# Altium PCB soldeerstation.PcbDoc
Units mil, origin at the board's own origin, x right, y up, seen from the top; angles counter-clockwise.
Board outline 3925 x 5005 mil, 2 copper layers (Top Layer, Bottom Layer); 68 components, 38 nets, 229 pads, 26 vias.
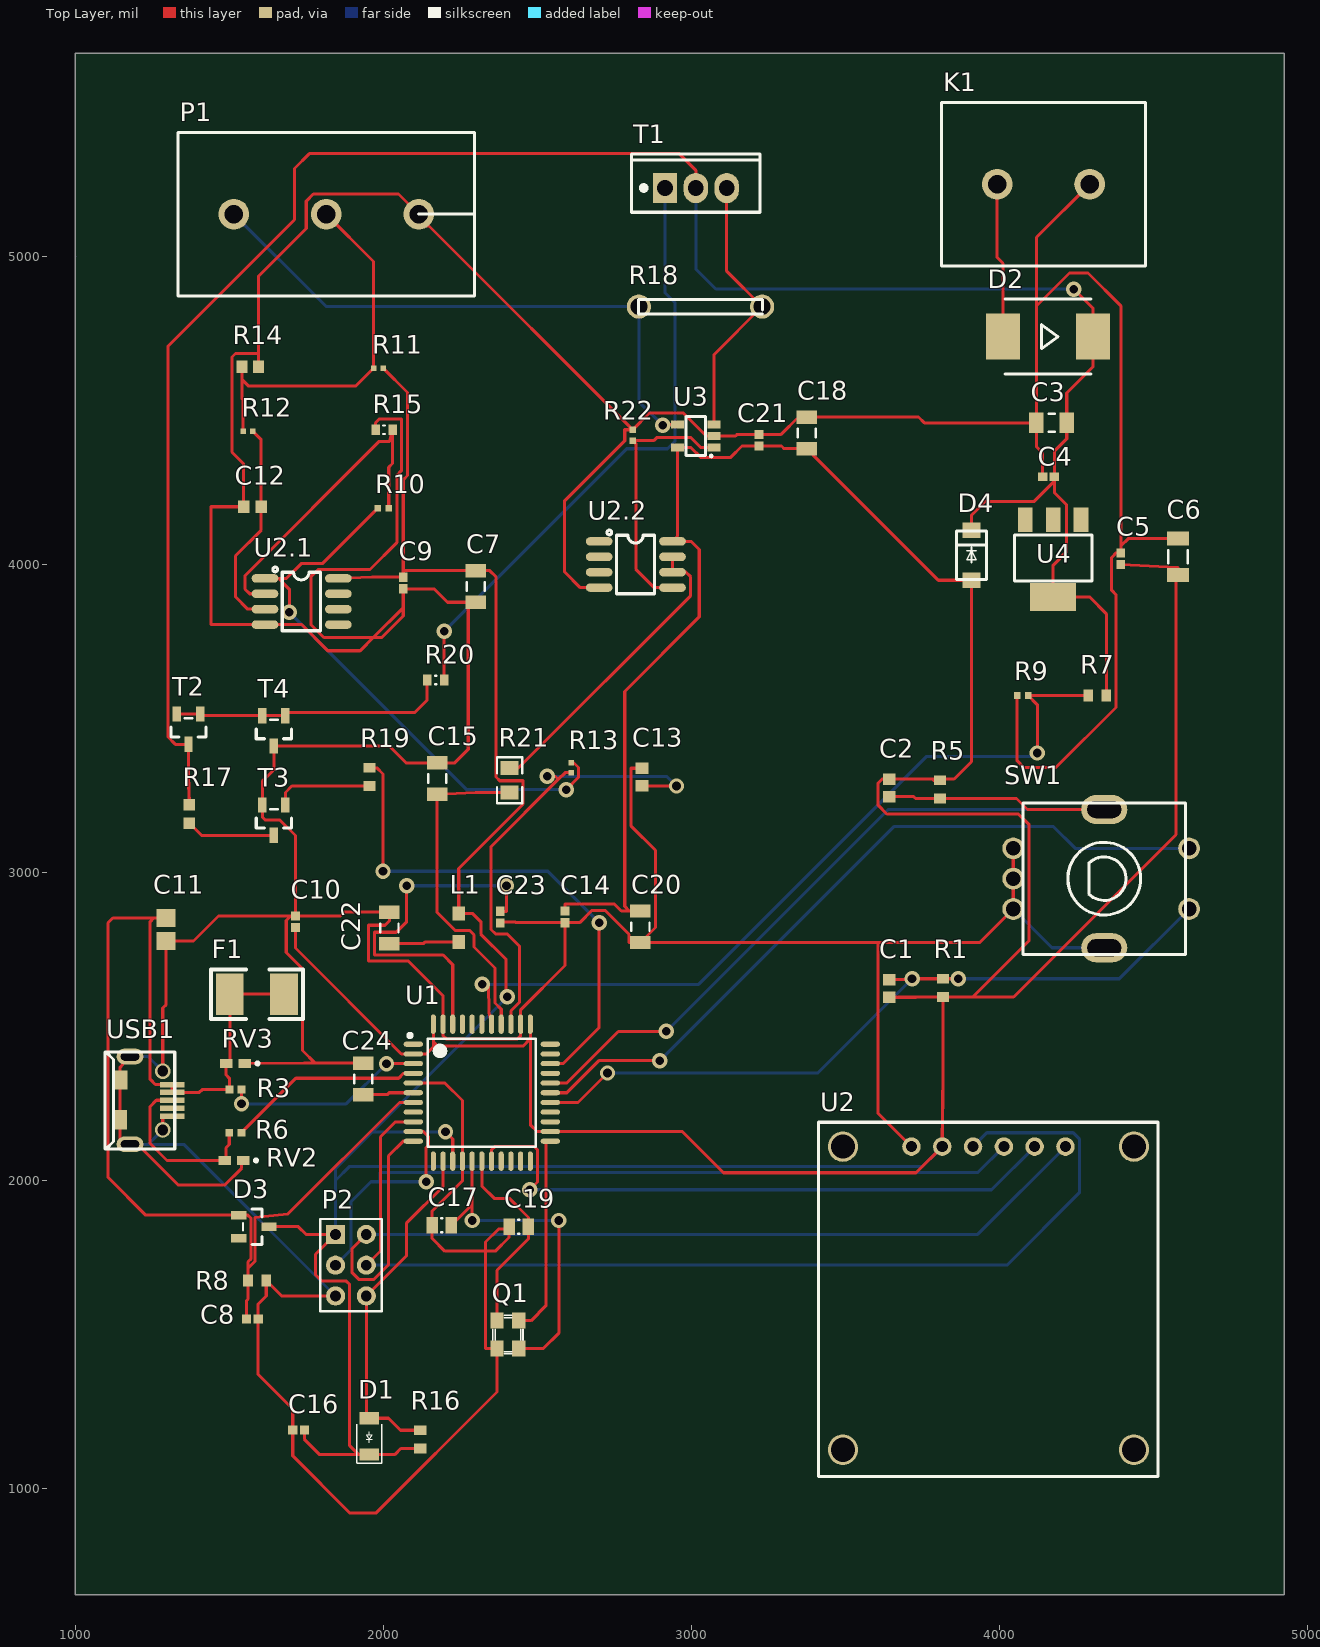
[diagram p0: Top Layer view]
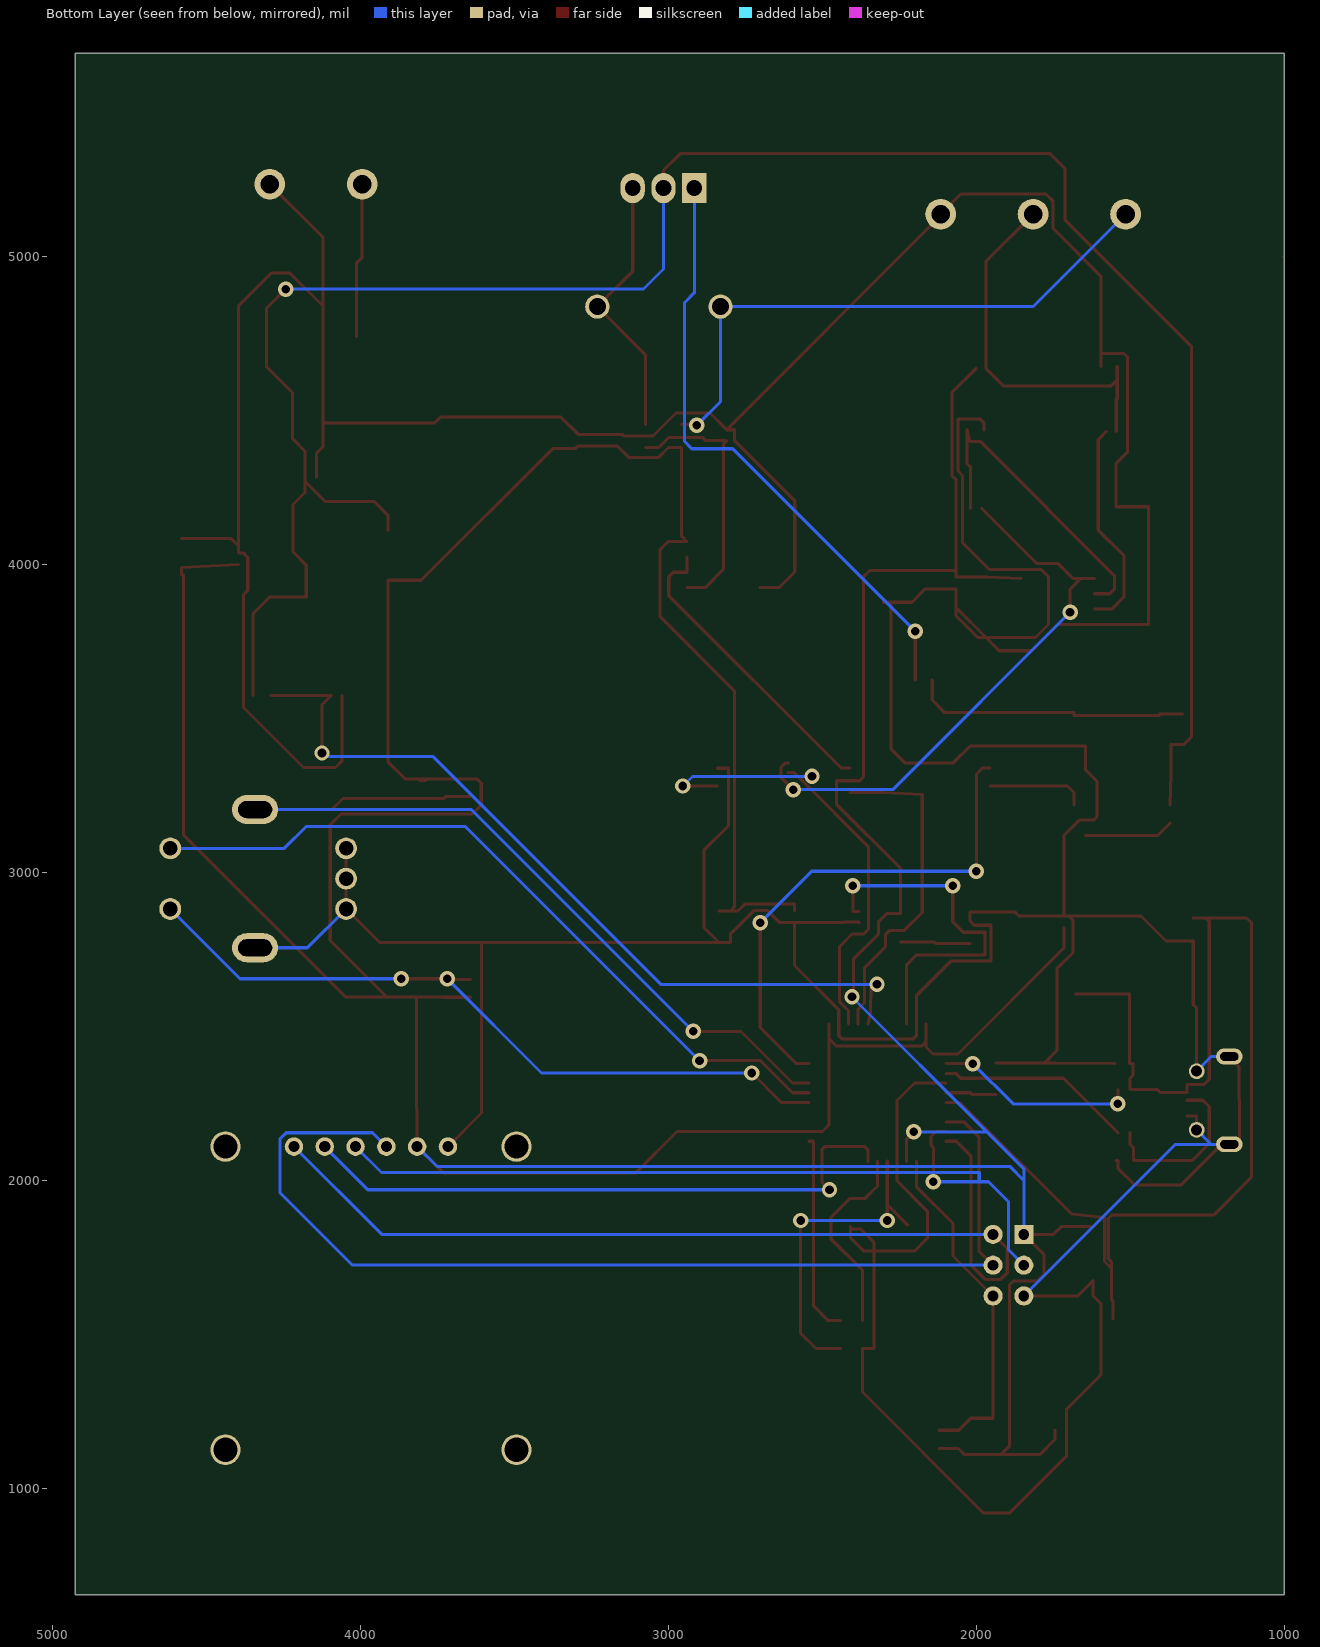
[diagram p1: Bottom Layer view, seen from below]

## Layer stack, top to bottom
Top Solder: solder mask 0.4, Solder Resist, Dk 3.5
Top Layer: signal copper 1.4
Dielectric 1: dielectric 12.6, FR-4, Dk 4.8
Bottom Layer: signal copper 1.4
Bottom Solder: solder mask 0.4, Solder Resist, Dk 3.5

## Board outline
1000,655 4925,655 4925,5660 1000,5660
cut-out: 1005,5000

## Design rules (kind name [scope] priority, off if disabled: settings)
Clearance [All] p1: gap=10 ignorepadtopadclearanceinfootprint=FALSE except(0: Arc-Hole Track-Hole SMDPad-Hole THPad-Hole Via-Hole Fill-Hole Poly-Hole Region-Hole Text-Hole)
PolygonConnect [All] p1: connectstyle=Relief reliefconductorwidth=10 reliefentries=4 polygonreliefangle="90 Angle" airgapwidth=10
RoomDefinition soldeerstation_twee [InComponentClass('soldeerstation_twee')] p1: confinementstyle=ConfineIn formatcopy=TRUE lockcomponents=FALSE outline 7125,2292.56 16955,2292.56 16955,3382.56 7125,3382.56
RoomDefinition soldeerstation_Schematic [InComponentClass('soldeerstation_Schematic')] p2: confinementstyle=ConfineIn formatcopy=TRUE lockcomponents=FALSE outline 6881.1,1010 14201.1,1010 14201.1,2285 6881.1,2285
RoutingVias [All] p1: holewidth=28 width=50 viastyle="Through Hole" minholewidth=28 minwidth=50 maxholewidth=28 maxwidth=50
SolderMaskExpansion [All] p1: expansion=4 istentingtop=FALSE
Width [All] p1: maxlimit=10 minlimit=10 preferedwidth=10
30 further rules are at their usual default settings.

## Classes and differential pairs
component class soldeerstation_twee: C8 C11 C12 C13 C14 C15 C16 C18 C20 C21 C22 D1 D3 F1 L1 P1 P2 R3 R6 R8 R10 R11 R12 R13 R14 R15 R16 R17 R18 R19 R20 R21 R22 RV2 RV3 T1 T2 T3 T4 U2.1 U2.2 U3 USB1
component class soldeerstation_Schematic: C1 C2 C3 C4 C5 C6 C7 C9 C10 C17 C19 C23 C24 D2 D4 K1 Q1 R1 R5 R7 R9 SW1 U1 U2 U4

## Components (designator, comment, footprint, x,y, rotation, side; value= is the part's Value field where it differs from the comment)
C1 "GRM188R71H103KA01D" CAPC1608X90X35ML10T15 3642.56,2623.54 r270 top
C2 "GRM188R71H103KA01D" CAPC1608X90X35ML10T15 3642.56,3275 r90 top
C3 "CL31B106KLHNNNE" CAPC3216X180X50LL20T30 4170,4460 r0 top
C4 "C0402C104K8PACTU" CAPC1005X60X30ML05T10 4160,4285 r0 top
C5 "C0402C104K8PACTU" CAPC1005X60X30ML05T10 4395,4018.9 r270 top
C6 "CAP 47uF 10V 1206(3216)" CAPC1206(3216)190_N 4580,4025 r270 top value=47uF
C7 "C1206C106K8RACTU" CAPC3216X180X50LL20T25 2300,3928.82 r90 top
C8 "C0402C104K8PACTU" CAPC1005X60X30ML05T10 1575,1550 r180 top
C9 "C0402C104K8PACTU" CAPC1005X60X30ML05T10 2065,3940 r90 top
C10 "C0402C104K8PACTU" CAPC1005X60X30ML05T10 1715,2840 r90 top
C11 "GRM219R61A226MEA0D" CAPC2013X95X45ML15T25 1295,2815 r90 top
C12 "GRM188R71H103KA01D" CAPC1608X90X35ML10T15 1575,4187.56 r0 top
C13 "GRM188R71H103KA01D" CAPC1608X90X35ML10T15 2840,3310 r270 top
C14 "C0402C104K8PACTU" CAPC1005X60X30ML05T10 2590,2856.1 r90 top
C15 "12061C105KAT2A" CAPC3216X180X50LL20T25 2175,3305 r270 top
C16 "C0402C104K8PACTU" CAPC1005X60X30ML05T10 1725,1190 r180 top
C17 "CAP 22pF 50V 0805(2012)" CAPC0805(2012)100_L 2190,1855 r0 top value=22pF
C18 "C1206C106K8RACTU" CAPC3216X180X50LL20T25 3375,4427.56 r270 top
C19 "CAP 22pF 50V 0805(2012)" CAPC0805(2012)100_L 2440,1850 r0 top value=22pF
C20 "C1206C106K8RACTU" CAPC3216X180X50LL20T25 2835,2823.82 r90 top
C21 "C0402C104K8PACTU" CAPC1005X60X30ML05T10 3220,4403.66 r270 top
C22 "12061C105KAT2A" CAPC3216X180X50LL20T25 2020,2820 r90 top
C23 "C0402C104K8PACTU" CAPC1005X60X30ML05T10 2380,2855 r90 top
C24 "12061C105KAT2A" CAPC3216X180X50LL20T25 1935,2330 r270 top
D1 "CD1206-S01575" D-1206 1955,1169.07 r90 top
D2 "MBRS540T3G" SMC 4158.39,4740 r180 top
D3 "BAT54" SOT-23(SOT-23-3) 1580,1850 r270 top
D4 "S1A" SMA(DO-214AC) 3910,4030 r90 top
F1 "MF-MSMF050-2" 1812 1590,2605 r180 top
K1 "WJ25C-B-2P" WJ25C-B-7.62-2P 4143.49,5235 r90 top
L1 "74279206" SMD-0805 2245,2820 r270 top
P1 "WJ25C-B-7.62-3P-13-00A" WJ25C-B-7.62-3P 1815,5137.56 r90 top
P2 "Header-Male-2.54_2x3" HDR-3X2/2.54 1895,1725 r270 top
Q1 "KX-7" KX-7 2440,1545 r270 top
R1 "RC0603FR-0710KL" RESC1608X55X25ML10T15 3817.56,2625.47 r270 top
R3 "ERJ-2RKF22R0X" RESC1005X40X25ML05T05 1520,2295 r0 top
R5 "RC0603FR-0710KL" RESC1608X55X25ML10T15 3807.56,3270 r90 top
R6 "ERJ-2RKF22R0X" RESC1005X40X25ML05T05 1519.68,2155 r0 top
R7 "RC0603FR-0710KL" RESC1608X55X25ML10T15 4318.39,3575 r0 top
R8 "RC0603FR-0710KL" RESC1608X55X25ML10T15 1590.47,1675 r180 top
R9 "ERJ2RKF2701X" RESC1005X40X25NL05T05 4076.1,3575 r0 top
R10 "ERJ2RKF1802X" RESC1005X40X25NL05T05 2000,4182.56 r0 top
R11 "ERJ-2RKF1004X" RESC1005X40X25LL05T05 1984.25,4637.56 r0 top
R12 "ERJ2RKF5601X" RESC1005X40X25LL05T05 1560.75,4432.56 r180 top
R13 "ERJ2RKF5601X" RESC1005X40X25LL05T05 2610,3340 r90 top
R14 "CRCW060310M0FKEA" RESC1609X50X30ML10T20 1568.43,4642.56 r180 top
R15 "91R 1% 0603(1608)" RESC0603(1608)_L 2002.56,4437.56 r180 top value="91.00 Ohm"
R16 "RC0603FR-0710KL" RESC1608X55X25ML10T15 2120,1159.53 r90 top
R17 "ERJ-3EKF4701V" RESC1608X55X30NL15T15 1370,3190 r90 top
R18 "0.02" LR12DL1020LJ 3030,4837.56 r180 top
R19 "RC0603FR-0710KL" RESC1608X55X25ML10T15 1955,3310.47 r270 top
R20 "91R 1% 0603(1608)" RESC0603(1608)_L 2170,3625 r0 top value="91.00 Ohm"
R21 "100K" 0805 2410,3300 r90 top
R22 "ERJ2RKF5603X" RESC1005X40X25NL05T05 2810,4420 r270 top
RV2 "CG0603MLC-05E" BOUR-CG0603-2_V 1515,2065 r180 top
RV3 "CG0603MLC-05E" BOUR-CG0603-2_V 1519.92,2380 r180 top
SW1 "PEC11R-4015F-S0024" BOURNS_PEC11R-4XXXF-SXXXX 4331.1,2980 r270 top
T1 "IRF9540NPBF" TO-220(TO-220-3) 3015,5222.56 r90 top (schematic designator Q6)
T2 "BC847C" SOT-23(SOT-23-3) 1367.6,3465.8 r180 top
T3 "BC847C" SOT-23(SOT-23-3) 1645,3170 r180 top (schematic designator T2)
T4 "BC857C" SOT-23(SOT-23-3) 1645,3460 r180 top (schematic designator T3)
U1 "ATMEGA32U4-AU" QFP-44_10X10X08P 2320,2285 r0 top
U2 "Oled_0.96" OLED_0.96'' 3964.98,2109.95 r0 top
U2.1 "MCP6002T-E/SN" SOIC-8_150MIL 1735,3880 r0 top
U2.2 "MCP6002T-E/SN" SOIC-8_150MIL 2820,4000 r0 top
U3 "INA138NA250" SOT-23-5 3015,4417.56 r180 top
U4 "NCP1117ST50T3G" SOT-223 4175,4020 r270 top
USB1 "micro USB_B Female" MICRO-USB-1 1230,2260 r180 top

## Footprints (in the part's own frame and the unit in brackets; to place one, negate y for a bottom-side part, rotate by r counter-clockwise, add the part's x,y. Pads: shape width x height; smd on the part's side, far side on the other; paste and mask are expansions set on the pad)
0805 [mil]
  rect 45.67x57.87 smd: 1(-40,0) 2(40,0)
  silkscreen extent -75,-41 74,41
1812 [mil]
  rect 90x133.86 smd: 1(-88,0) 2(88,0)
  silkscreen extent -150,-80 150,80
BOUR-CG0603-2_V [mm] "SMD, 2-Leads, Body 1.6x0.8mm, Pitch 1.52mm"
  rect 1.02x0.76 smd: 1(-0.76,0) 2(0.76,0)
  silkscreen extent -1.94,-0.12 -1.7,0.12, body extent -0.8,-0.4 0.8,0.4, height 0.55
BOURNS_PEC11R-4XXXF-SXXXX [mm]
  round 1.8 hole 1.2: 1(-2.5,7.25) 2(2.5,7.25) A(-2.5,-7.25) B(2.5,-7.25) C(0,-7.25)
  oval 2.4x3.8 hole 1.4 slot 2.8 at 90 deg: MT1(-5.7,0.25) MT2(5.7,0.25)
  silkscreen extent -6.25,-6.45 6.25,6.95
CAPC0805(2012)100_L [mm] "Chip Capacitor, Body 2.0x1.2mm, Height 1.0mm, IPC High Density"
  rect 0.95x1.35 smd: 1(-0.8,0) 2(0.8,0)
  silkscreen extent -0.05,-0.58 0.05,0.58, body extent -1.1,-0.72 1.1,0.72, height 1
CAPC1005X60X30ML05T10 [mm] "Chip Capacitor, 2-Leads, Body 1.00x0.50mm, IPC Low Density"
  rect 0.76x0.72 smd: 1(-0.48,0) 2(0.48,0)
  body extent -0.53,-0.28 0.53,0.27, height 0.6
CAPC1206(3216)190_N [mm] "Chip Capacitor, Body 3.2x1.6mm, Height 1.9mm, IPC Medium Density"
  rect 1.15x1.8 smd: 1(-1.5,0) 2(1.5,0)
  silkscreen extent -0.55,-0.8 0.55,0.8, body extent -1.7,-0.9 1.7,0.9, height 1.9
CAPC1608X90X35ML10T15 [mm] "Chip Capacitor, 2-Leads, Body 1.7x0.9mm, IPC Low Density"
  rect 0.95x1.05 smd: 1(-0.725,0) 2(0.725,0)
  body extent -0.85,-0.45 0.85,0.45, height 0.9
CAPC2013X95X45ML15T25 [mm] "Chip Capacitor, 2-Leads, Body 2.00x1.25mm, IPC Low Density"
  rect 1.45x1.55 smd: 1(-0.95,0) 2(0.95,0)
  body extent -1.08,-0.7 1.07,0.7, height 0.95
CAPC3216X180X50LL20T25 [mm] "Chip Capacitor, 2-Leads, Body 3.20x1.60mm, IPC High Density"
  rect 1.1x1.7 smd: 1(-1.3,0) 2(1.3,0)
  silkscreen extent -0.35,-0.75 0.35,0.75, body extent -1.7,-0.9 1.7,0.9, height 1.8
CAPC3216X180X50LL20T30 [mm] "Chip Capacitor, 2-Leads, Body 3.4x1.8mm, IPC High Density"
  rect 1.2x1.7 smd: 1(-1.25,0) 2(1.25,0)
  silkscreen extent -0.25,-0.75 0.25,0.75, body extent -1.7,-0.9 1.7,0.9, height 1.8
D-1206 [mm]
  rect 1x1.6 smd: 1(1.499,0) 2(-1.5,0)
  silkscreen extent -2.2,-1.03 1,1.02
HDR-3X2/2.54 [mil]
  rect 62x62 hole 35: 1(-100,-50)
  round 62 hole 35: 2(-100,50) 3(0,-50) 4(0,50) 5(100,-50) 6(100,50)
  silkscreen extent -150,-100 150,100
KX-7 [mil]
  rect 51.18x43.31 smd: 1(0,-70.87) 2(90.55,-70.87) 3(90.55,0) 4(0,0)
  silkscreen extent -18,-85 108,14
LR12DL1020LJ [mm]
  round 2 hole 1.4: 1(-5.08,0) 2(5.08,0)
  silkscreen extent -5.1,-0.6 5.1,0.6
MICRO-USB-1 [mm]
  round 1.3 hole 0.9: 0(-1.371,2.431) 0(-1.371,-2.41)
  oval 2.2x1.3 hole 0.7 slot 1.5 at 0 deg: 0(1.329,3.619) 0(1.329,-3.619)
  rect 1.2x1.6 smd: 0(2.14,-1.683) 0(2.156,1.596)
  rect 2x0.45 smd: 1(-2.156,-1.31) 2(-2.156,-0.66) 3(-2.156,-0.01) 4(-2.156,0.64) 5(-2.156,1.29)
  silkscreen extent -2.36,-4 3.4,4
OLED_0.96'' [mil]
  round 60 hole 35.98: 1(-249.98,0.05) 2(-149.98,0.05) 3(-49.98,0.05) 4(50.02,0.05) 5(150.02,0.05) 6(250.02,0.05)
  round 98.42 hole 78.74: ""(-472.48,-984.25) ""(-472.48,0.05) ""(472.42,-984.25) ""(472.42,0.05)
  silkscreen extent -551,-1071 551,79
QFP-44_10X10X08P [mm]
  oval 1.6x0.42 smd: 1(-5.65,4) 2(-5.65,3.2) 3(-5.65,2.4) 4(-5.65,1.6) 5(-5.65,0.8) 6(-5.65,0) 7(-5.65,-0.8) 8(-5.65,-1.6) 9(-5.65,-2.4) 10(-5.65,-3.2) 11(-5.65,-4) 23(5.65,-4) 24(5.65,-3.2) 25(5.65,-2.4) 26(5.65,-1.6) 27(5.65,-0.8) 28(5.65,0) 29(5.65,0.8) 30(5.65,1.6) 31(5.65,2.4) 32(5.65,3.2) 33(5.65,4)
  oval 0.42x1.6 smd: 12(-4,-5.65) 13(-3.2,-5.65) 14(-2.4,-5.65) 15(-1.6,-5.65) 16(-0.8,-5.65) 17(0,-5.65) 18(0.8,-5.65) 19(1.6,-5.65) 20(2.4,-5.65) 21(3.2,-5.65) 22(4,-5.65) 34(4,5.65) 35(3.2,5.65) 36(2.4,5.65) 37(1.6,5.65) 38(0.8,5.65) 39(0,5.65) 40(-0.8,5.65) 41(-1.6,5.65) 42(-2.4,5.65) 43(-3.2,5.65) 44(-4,5.65)
  silkscreen extent -6.08,-4.45 4.45,4.87
RESC0603(1608)_L [mm] "Chip Resistor, Body 1.6x0.8mm, IPC High Density"
  rect 0.7x0.9 smd: 1(-0.7,0) 2(0.7,0)
  silkscreen extent -0.05,-0.35 0.05,0.35, body extent -0.85,-0.47 0.85,0.47, height 0.6
RESC1005X40X25LL05T05 [mm] "Chip Resistor, 2-Leads, Body 1.05x0.55mm, IPC High Density"
  rect 0.45x0.45 smd: 1(-0.4,0) 2(0.4,0)
  body extent -0.53,-0.28 0.53,0.28, height 0.4
RESC1005X40X25ML05T05 [mm] "Chip Resistor, 2-Leads, Body 1.05x0.55mm, IPC Low Density"
  rect 0.65x0.65 smd: 1(-0.5,0) 2(0.5,0)
  body extent -0.53,-0.28 0.53,0.28, height 0.4
RESC1005X40X25NL05T05 [mm] "Chip Resistor, 2-Leads, Body 1.00x0.50mm, IPC Medium Density"
  rect 0.55x0.55 smd: 1(-0.45,0) 2(0.45,0)
  body extent -0.53,-0.27 0.53,0.28, height 0.4
RESC1608X55X25ML10T15 [mm] "Chip Resistor, 2-Leads, Body 1.60x0.80mm, IPC Low Density"
  rect 0.8x1 smd: 1(-0.75,0) 2(0.75,0)
  body extent -0.85,-0.45 0.85,0.45, height 0.55
RESC1608X55X30NL15T15 [mm] "Chip Resistor, 2-Leads, Body 1.75x0.95mm, IPC Medium Density"
  rect 0.95x0.95 smd: 1(-0.75,0) 2(0.75,0)
  body extent -0.87,-0.48 0.87,0.48, height 0.55
RESC1609X50X30ML10T20 [mm] "Chip Resistor, 2-Leads, Body 1.55x0.85mm, IPC Low Density"
  rect 0.9x1.05 smd: 1(-0.675,0) 2(0.675,0)
  body extent -0.82,-0.48 0.82,0.48, height 0.5
SMA(DO-214AC) [mil]
  rect 50x57.9 smd: 1(-81,0) 2(81,0)
  silkscreen extent -78,-49 79,49
SMC [mil]
  rect 110.2x149.6 smd: A(146,0) C(-146,0)
  silkscreen extent -140,-122 140,122
SMD-0805 [mm] "Chip Inductor, 2-Leads, Body 2.0x1.2mm"
  rect 1.15x1 smd: 1(-1.175,0) 2(1.175,0)
  body extent -1,-0.6 1,0.6, height 0.89
SOIC-8_150MIL [mm]
  oval 2.2x0.7 smd: 1(-3.023,1.905) 2(-3.023,0.635) 3(-3.023,-0.635) 4(-3.023,-1.905) 5(3.023,-1.905) 6(3.023,-0.635) 7(3.023,0.635) 8(3.023,1.905)
  silkscreen extent -2.37,-2.41 1.55,2.83
SOT-23(SOT-23-3) [mm]
  rect 0.7x1.25 smd: 1(-0.95,-1.25) 2(0.95,-1.25) 3(0,1.25)
  silkscreen extent -1.46,-0.9 1.46,0.65
SOT-23-5 [mm]
  rect 1.06x0.65 smd: 1(-1.5,0.95) 2(-1.5,0) 3(-1.5,-0.95) 4(1.5,-0.95) 5(1.5,0.95)
  silkscreen extent -1.33,-1.6 0.8,1.71
SOT-223 [mm]
  rect 2x1.2 smd: 1(-3.175,2.3) 2(-3.175,0) 3(-3.175,-2.3)
  rect 2.3x3.8 smd: 4(3.175,0)
  silkscreen extent -1.93,-3.2 1.87,3.2
TO-220(TO-220-3) [mm]
  rect 2.5x2 hole 1.3: 1(0,2.54)
  oval 2.5x2 hole 1.3: 2(0,0) 3(0,-2.54)
  silkscreen extent -2,-5.3 2.8,5.3
WJ25C-B-7.62-2P [mil]
  round 100 hole 60: 1(0,150.1) 2(0,-150.1)
  silkscreen extent -266,-331 266,331
WJ25C-B-7.62-3P [mil]
  round 100 hole 60: 1(0,300.19) 2(0,-0.01) 3(0,-300.2)
  silkscreen extent -266,-481 266,481

## Part data
C1 C2 C12 C13: library part CMP-2100-03642-1, "Chip Capacitor, 10 nF, +/- 10%, 50 V, -55 to 125 degC, 0603 (1608 Metric), RoHS, Tape and Reel", Capacitance=10nF, Case Code (Imperial)=0603, Case Code (Metric)=1608, Dielectric=X7R, Dielectric Material=Ceramic, Insulation Resistance=10GR, Manufacturer=Murata, Max Operating Temperature=125degC, Min Operating Temperature=-55degC, Package Description="2-Pin Surface Mount Device, Body 1.6 x 0.8 mm", Package Quantity=1, Tolerance=10%, Voltage=50V, Case/Package=0603, Datasheet URL=http://search.murata.co.jp/Ceramy/image/img/A01X/G101/ENG/GRM188R71H103KA01-01.pdf, Datasheet Version=42401.0, Depth=0.8mm, Height=0.8mm, Lead Free=LeadFree, Length=1.6mm, Manufacturer URL=http://www.murata.com/, Material=Ceramic, Mount=SurfaceMount, Number of Pins=2, Package Reference=0603, Packaging=TapeandReel, REACH SVHC=Unknown, RoHSCompliant=True, Termination=SMD/SMT, Thickness=0.035inch, Voltage Rating=50V, Voltage Rating (DC)=50V, Width=0.031inch
C3: library part CMP-2000-06108-1, "Chip Capacitor, 10 uF, +/- 10%, 35 V, -55 to 125 degC, 1206 (3216 Metric), RoHS, Tape and Reel", Capacity (elec.)=10µF, Manufacturer="Samsung Electro-Mechanics", Nominal voltage=35V, Package Description="2-Pin Surface Mount Device, Body 3.2 x 1.6 mm", Package Reference=1206, Tolerance=10%, Category=Ceramiccapacitor, Content=2000pc(s), Datasheet URL=http://www.samsungsem.com/kr/support/product-search/mlcc/__icsFiles/afieldfile/2016/08/18/S_CL31B106KLHNNNE.pdf, Datasheet Version=07/2016, Industrial packaging=Yes, Manufacturer URL=http://www.samsungsem.com/global/index.jsp, Material=Ceramic, Material properties=X7R, Mounting Technology=SurfaceMount, Packaging type=Reel, Type=1206
C4 C5 C8 C9 C10 C14 C16 C21 C23: library part CMP-2008-02046-1, Manufacturer=Kemet, Part Number=C0402C104K8PACTU
C6: library part CMP-1037-05002-1, "CAP 47uF 10V ±20% 1206 (3216 Metric) Thickness 1.9mm SMD", Case-EIA=1206, Case-Metric=3216, Rated Voltage="10 V", Tolerance=Â±20%, Max Thickness="1.9 mm", Technology=SMT
C7 C18 C20: library part CMP-2000-06013-1, "Chip Capacitor, 10 uF, +/- 10%, 10 V, -55 to 125 degC, 1206 (3216 Metric), RoHS, Tape and Reel", Capacitance=10uF, Case Code - in=1206, Case Code - mm=3216, Case Height=1.6mm, Case Length=3.2mm, Dielectric=X7R, Manufacturer=Kemet, Maximum Operating Temperature=+125C, Minimum Operating Temperature=-55C, Operating Temperature Range=-55Cto+125C, Package / Case=1206(3216metric), Package Description="2-Pin Surface Mount Device, Body 3.2 x 1.6 mm", Temperature Coefficient / Code=+/-15%, Tolerance=10%, Voltage Rating=10V, =C1206C106K8RAC7800, Brand=Kemet, Case Width=1.6mm, Class=Class1, Datasheet URL=http://www.kemet.com/docfinder?Partnumber=C1206C106K8RACTU, Datasheet Version=02/2016, Dimensions=1.6mmWx3.2mmLx1.6mmH, Dissipation Factor DF=5, Factory Pack Quantity=2000, Manufacturer URL=http://www.kemet.com/, Mounting Technology=SurfaceMount, Package Reference=1206, Packaging=Reel, Product=GeneralTypeMLCCs, Product Category=MultilayerCeramicCapacitorsMLCC-SMD/SMT, RoHS=Details, Series=C1206C, Termination Style=SMD/SMT, Type=SMDMLCCX7R6.3-250VDCCommericalGrade, Voltage Rating DC=10V
C11: library part CMP-2007-00096-1, Manufacturer=Murata, Part Number=GRM219R61A226MEA0D
C15 C22 C24: library part CMP-2000-05861-1, "Chip Capacitor, 1 uF, +/- 10%, 100 V, -55 to 125 degC, 1206 (3216 Metric), RoHS, Tape and Reel", Capacitance=1µF, Case Size/Dimension=1206, Dielectric=X7R, Manufacturer=AVX, Package Description="2-Pin Surface Mount Device, Body 3.2 x 1.6 mm", Rated Voltage=100V, Tolerance (%)=±10%, Datasheet URL=http://datasheets.avx.com/X7RDielectric.pdf, Datasheet Version=07/2016, Manufacturer URL=http://www.avx.com/, Mounting Technology=SurfaceMount, Package Reference=1206
C17 C19: library part CMP-1036-01245-1, "CAP 22pF 50V ±10% 0805 (2012 Metric) Thickness 1mm SMD", Case-EIA=0805, Case-Metric=2012, Rated Voltage="50 V", Tolerance=Â±10%, Max Thickness="1 mm", Technology=SMT
D1 F1 SW1: BOM_Manufacturer=BOURNS, BOM_Supplier=LCSC
  D1: BOM_Manufacturer Part=CD1206-S01575, BOM_Supplier Part=C75465, Contributor=LCSC, spicePre=D
  F1: BOM_Manufacturer Part=MF-MSMF050-2, BOM_Supplier Part=C17313, spicePre=U
  SW1: BOM_Manufacturer Part=PEC11R-4015F-S0024, BOM_Supplier Part=C143789, Contributor=LCSC, spicePre=S
D2: BOM_Manufacturer Part=?, Manufacturer="ON Semiconductor", Contributor=elnarte, nameAlias=Model, spicePre=D, spiceSymbolName=MBRS540T3G
D3 T2 T3 T4: BOM_Manufacturer=Hottech, BOM_Supplier=LCSC, Contributor=LCSC
  D3: BOM_Manufacturer Part=BAT54, BOM_Supplier Part=C181198, spicePre=D
  T2 T3: BOM_Manufacturer Part=BC847C, BOM_Supplier Part=C181141, spicePre=Q
  T4: BOM_Manufacturer Part=BC857C, BOM_Supplier Part=C181147, spicePre=Q
D4: BOM_Manufacturer=MDD, BOM_Manufacturer Part=S1A, BOM_Supplier=LCSC, BOM_Supplier Part=C64912, image=//image.lceda.cn/szlcsc/C64912.jpg, spicePre=D
K1 P1: BOM_Manufacturer=ReliaPro, BOM_Supplier=LCSC, spicePre=P
  K1: BOM_Manufacturer Part=WJ25C-B-2P, BOM_Supplier Part=C8422, image=//image.lceda.cn/szlcsc/C8422.jpg
  P1: BOM_Manufacturer Part=WJ25C-B-7.62-3P-13-00A, BOM_Supplier Part=C61583, image=//image.lceda.cn/szlcsc/C61583.jpg
L1: library part CMP-0220-00038-1, "SMD EMI Suppression Ferrite Bead WE-CBF, Z = 30 Ohm", ComponentLink1Description="Manufacturer Link", ComponentLink1URL=http://www.we-online.com, ComponentLink2Description=Datasheet, ComponentLink2URL=http://www.we-online.de/katalog/media/pdf/74279206.pdf, DatasheetVersion=Dec-2005, Impedance="30 Ohm", PackageDescription="Chip Inductor, 2-Leads, Body 2.0 x 1.2 mm", PackageReference=SMD-0805, PackageVersion=2005
P2: BOM_Manufacturer=BOOMELE, BOM_Manufacturer Part=Header-Male-2.54_2x3, BOM_Supplier=LCSC, BOM_Supplier Part=C65114, spicePre=P
Q1: BOM_Manufacturer Part="GEYER 32MHz 10/10", Contributor=bazis.ural, spicePre=Q
R1 R5 R7 R8 R16 R19: library part CMP-2100-03664-1, "Chip Resistor, 10 KOhm, +/- 1%, 01 W, -55 to 155 degC, 0603 (1608 Metric), RoHS, Tape and Reel", Case Code (Imperial)=0603, Case Code (Metric)=1608, Manufacturer=Yageo, Max Operating Temperature=155degC, Min Operating Temperature=-55degC, Package Description="2-Pin Surface Mount Device, Body 1.6 x 0.8 mm", Power Rating=100mW, Resistance=10KOhm, Temperature Coefficient=100ppm/degreesC, Tolerance=1%, Voltage Rating=75V, Voltage Rating (DC)=50V, Case/Package=0603, Composition=ThickFilm, Datasheet URL=http://www.yageo.com/NewPortal/yageodocoutput?fileName=/pdf/R-Chip/PYu-RC_Group_51_RoHS_L_5.pdf, Datasheet Version="Rev. 5, 10/2016", Depth=0.8mm, Height=0.45mm, Lead Free=LeadFree, Lead Pitch=0.3mm, Length=1.6mm, Manufacturer URL=http://www.yageo.com/, Military Standard=Not, Number of Pins=2, Package Reference=0603, Packaging=TapeandReel, REACH SVHC=NoSVHC, RoHSCompliant=true, Termination=SMD/SMT, Weight=7.1E-05oz, Width=0.8mm
R3 R6: library part CMP-1665-00027-3, "Chip Resistor, 22 Ohm, +/- 1%, 0.1 W, -55 to 155 degC, 0402 (1005 Metric), RoHS, Tape and Reel", Case Code (Imperial)=0402, Case Code (Metric)=1005, Max Operating Temperature="155 degC", Min Operating Temperature="-55 degC", Package Quantity=10000, Power Rating="100 mW", Resistance="22 Ohm", Tolerance=1%, Voltage Rating="50 V", Case\/Package=0402, ComponentLink1Description="Manufacturer URL", ComponentLink1URL=http://www.panasonic.com/, ComponentLink2Description=Datasheet, ComponentLink2URL=http://industrial.panasonic.com/cdbs/www-data/pdf/RDA0000/AOA0000C86.pdf, DatasheetVersion=04/2015, Height="0.35 mm", Length="1 mm", Mount="Surface Mount", Mounting Technology="Surface Mount", PackageDescription="2-Pin Surface Mount Device, Body 1 x 0.5 mm", PackageReference=0402, Packaging="Tape and Reel", PartNumber=ERJ-2RKF22R0X, Pins=2, REACH SVHC=Yes, RoHSCompliant=true, Weight=2.8E-05oz, Width="0.5 mm"
R9: library part CMP-2002-01138-1, Manufacturer=Panasonic, Part Number=ERJ2RKF2701X
R10: library part CMP-2002-01129-1, Manufacturer=Panasonic, Part Number=ERJ2RKF1802X
R11: library part CMP-2002-00609-3, "Chip Resistor, 1 MOhm, +/- 1%, 100 mW, -55 to 155 degC, 0402 (1005 Metric), RoHS, Tape and Reel", Case Code (Imperial)=0402, Case Code (Metric)=1005, Manufacturer="Basic Passives", Max Operating Temperature="155 degC", Min Operating Temperature="-55 degC", Package Quantity=10000, Power Rating="100 mW", Resistance="1 MOhm", Tolerance=1%, Voltage Rating="50 V", Case\/Package=0402, ComponentLink1Description="Manufacturer URL", ComponentLink1URL=http://www.panasonic.com/, ComponentLink2Description=Datasheet, ComponentLink2URL=http://industrial.panasonic.com/cdbs/www-data/pdf/RDA0000/AOA0000C86.pdf, DatasheetVersion=04/2015, Height="0.35 mm", Length="1 mm", Mount="Surface Mount", Mounting Technology="Surface Mount", PackageDescription="2-Pin Surface Mount Device, Body 1 x 0.5 mm", PackageReference=0402, Packaging="Tape and Reel", PartNumber=ERJ-2RKF1004X, Pins=2, Radiation Hardening=No, REACH SVHC=Yes, RoHSCompliant=true, Weight=2.8E-05oz, Width="0.5 mm"
R12 R13: library part CMP-2002-01160-1, Manufacturer=Panasonic, Part Number=ERJ2RKF5601X
R14: library part CMP-2000-03843-1, Manufacturer="Vishay Dale", Part Number=CRCW060310M0FKEA
R15 R20: library part CMP-1012-00393-1, "91R 0.1W 1% 0603 (1608 Metric)  SMD", Case-EIA=0603, Case-Metric=1608, Power="0.1 W", Tolerance="1 %", Technology=SMT
R17: library part CMP-1665-00059-1, "Precision Thick Film Chip Resistor, 4.7 KOhm, +/- 1%, -55 to 155 degC, 0603 (1608 Metric), RoHS, Tape and Reel", Case Code (Imperial)=1206, Case Code (Metric)=3216, Case\Package=1205, Max Operating Temperature="125 degC", Min Operating Temperature="-55 degC", Package Quantity=1, Power Rating="250 mW", Resistance="220 Ohm", Tolerance=5%, Type (Resistor)="Thick Film", Voltage Rating="50 V", ComponentLink1Description="Manufacturer URL", ComponentLink1URL=http://www.panasonic.com/, ComponentLink2Description=Datasheet, ComponentLink2URL=http://industrial.panasonic.com/cdbs/www-data/pdf/RDA0000/AOA0000C86.pdf, DatasheetVersion=Apr-15, Elements=4, Height="0.024 inch", Length="0.126 inch", Mount="Surface Mount", PackageDescription="2-Pin Surface Mount Device, Body 1.6 x 0.85 mm", PackageReference=0603, Packaging="Tape and Reel", Pins=8, Radiation Hardening=No, REACH SVHC="No SVHC", RoHSCompliant=true, Width="0.063 inch"
R18: BOM_Manufacturer=KOA, BOM_Manufacturer Part=LR12DL1020LJ, BOM_Supplier=LCSC, BOM_Supplier Part=C159865, Contributor=LCSC, nameAlias="Resistance (Ohms)", spicePre=R, spiceSymbolName=LR12DL1020LJ
R21: BOM_Manufacturer=UniOhm, BOM_Manufacturer Part=TC0525F1003T5E, BOM_Supplier=LCSC, BOM_Supplier Part=C57246, nameAlias="Resistance (Ohms)", spicePre=R, spiceSymbolName=TC0525F1003T5E
R22: library part CMP-2002-01162-1, Manufacturer=Panasonic, Part Number=ERJ2RKF5603X
RV2 RV3: library part CMP-0584-00001-2, "ESD Protector, 5 V Supply, -40 to 85 degC, 1.6 x 0.8 x 0.55 mm SMD, RoHS, Tape and Reel", Manufacturer=Bourns, Operating Temperature="-40 to 85 degC", CO="0.5 pF", ComponentLink1Description="Manufacturer URL", ComponentLink1URL=http://www.bourns.com/, ComponentLink2Description=Datasheet, ComponentLink2URL=http://www.bourns.com/data/global/pdfs/MLC.pdf, DatasheetVersion="Rev. S", Mounting Technology="Surface Mount", PackageDescription="2-Pin SMD, Body 1.6 x 0.8 mm, Pitch 1.52 mm", PackageReference=CG0603-2, Packing="Tape and Reel", PartNumber=CG0603MLC-05E, RoHS=TRUE, RT="1 ns", VC="20 V", VDC="5 V", VT="150 V"
T1: BOM_Manufacturer=IR, BOM_Manufacturer Part=IRF9540NPBF, BOM_Supplier=LCSC, BOM_Supplier Part=C2575, image=//image.lceda.cn/szlcsc/C2575.jpg, spicePre=Q
U1: BOM_Manufacturer=MICROCHIP, BOM_Manufacturer Part=ATMEGA32U4-AU, BOM_Supplier=LCSC, BOM_Supplier Part=C44854, image=//image.lceda.cn/szlcsc/C44854.jpg, spicePre=U
U2: BOM_Manufacturer Part=Oled_0.96'', Contributor="Ivan K", spicePre=U
U2.1: library part MCP6002T-E/SN_1, BOM_Manufacturer=MICROCHIP, Operating Temperature="-40¡ãC ~ 125¡ãC", BOM_Manufacturer Part=MCP6002T-E/SN, BOM_Supplier=LCSC, BOM_Supplier Part=C125816, spicePre=U, subpart_no=2
U2.2: BOM_Manufacturer=MICROCHIP, Operating Temperature="-40¡ãC ~ 125¡ãC", BOM_Manufacturer Part=MCP6002T-E/SN, BOM_Supplier=LCSC, BOM_Supplier Part=C125816, spicePre=U, subpart_no=1
U3: BOM_Manufacturer=TI, BOM_Manufacturer Part=INA138NA250, BOM_Supplier=LCSC, BOM_Supplier Part=C133804, Contributor=LCSC, spicePre=U
U4: BOM_Manufacturer=ON, BOM_Manufacturer Part=NCP1117ST50T3G, BOM_Supplier=LCSC, BOM_Supplier Part=C17314, image=//image.lceda.cn/szlcsc/C17314.jpg, spicePre=U, timeStamp=1466353290
USB1: BOM_Manufacturer=ValuePro, BOM_Manufacturer Part="micro USBFemale", BOM_Supplier=LCSC, BOM_Supplier Part=C10418, image=//image.lceda.cn/szlcsc/C10418.jpg, spicePre=U

## Via types
v1: diameter 50, hole 28, Top Layer to Bottom Layer, 26 vias

## Nets (pads, with @x,y where several pads share a name; then routed paths per layer and width w, separated by ;. In a path a pad name is that pad's centre, name@x,y a point inside that pad or via, vN(x,y) a via of type N, cw(c..) or ccw(c..) an arc to the next point about the centre after c; other vN are vias at no path point)
5V: C1.2 C2.2 C5.2 C6.2 C7.2 C9.2 C10.1 C14.2 C16.1 C18.2 C20.2 C21.2 D1.2 D3.3 D4.1 L1.1 P2.1 R1.2 R5.2 R11.2 R16.1 U1.2 U1.14 U1.24 U1.34 U1.44 U2.1.8 U2.2 U2.2.8 U3.5 | length 18557.8
  Top Layer w10: D3.3 1724,1850 1749,1825 P2.1 1780,1760 1780,1694 1801,1673 1880,1673 1891,1662 1891,1139 1920,1110 ; C10.1 1715,2754.61 2058.63,2410.98 U1.2 2140,2410.98 2162.52,2433.5 2162.52,2451 ; C16.1 1743.9,1160 1793.9,1110 1920,1110 ; U2.1.8 1962.9,3958.9 C9.2 2065,3980 ; R11.2 2078.9,4558.66 2078.9,4289.3 2065,4275.4 2065,3980 ; R16.1 2057,1130 2037,1110 D1.2 1920,1110 ; U1.44 2162.52,2451 ; v1(2202,2158) 2225.51,2134.49 U1.14 ; v1(2403,2596) 2398.74,2600.26 2398.74,2718.26 2317,2800 2317,2840 2290.74,2866.26 L1.1 2245,3013 2454,3222 2454,3298 2378,3298 2366,3310 2366,3960 2346,3980 C7.2 2065,3980 ; U1.34 2477.48,2460 ; C14.2 2590,2897.17 2751,2897.17 2773.17,2875 2799,2875 ; C20.2 2799,2875 ; C1.2 3729,2595 3729.94,2595.94 R1.2 ; R5.2 3787.33,3299.53 3783.31,3303.54 ; C5.2 4580,3990 C6.2 4574,3965.94 4574,3123 4046.94,2595.94 3914,2595.94 ; 2162.52,2451 2177.52,2436 2453.48,2436 2477.48,2460 ; 2477.48,2460 2477.48,2180.52 2498.98,2159.02 U1.24 2970.98,2159.02 3105,2025 3730,2025 U2.2 3817.56,2354.56 R1.2 ; 2799,2875 2784,2890 2784,3588 3026,3830 3026,4049 3000,4075 U2.2.8 2955.96,4091.96 U3.5 2998.84,4380.16 3031,4348 3128.24,4348 3165,4384.76 C21.2 3293,4384.76 3301.39,4376.38 C18.2 3802.38,3949 D4.1 3910,3360 3853.54,3303.54 3783.31,3303.54 ; 3783.31,3303.54 C2.2 3620,3303.54 3606.89,3290.43 3606.89,3218.11 3635,3190 4062,3190 4097,3155 4097,2778.94 3914,2595.94 ; R1.2 3914,2595.94
  Bottom Layer w10: P2.1 1845,2000 ; v1(2202,2158) 1965,2158 ; v1(2403,2596) 1965,2158 ; U2.2 3750.79,2045.79 1890.79,2045.79 1845,2000 ; 1845,2000 1845,2038 1965,2158
GND: C3.1 C4.1 C5.1 C6.1 C7.1 C8.1 C9.1 C10.2 C11.1 C12.1 C13.1 C14.1 C15.1 C16.2 C17.1 C18.1 C19.1 C20.1 C21.1 C22.2 C23.1 C24.1 K1.2 P1.3 P2.5 Q1.2 R8.1 R9.1 R14.1 R15.2 R22.1 RV2.1 RV3.1 SW1.A SW1.B SW1.C SW1.MT2 T3.2 T4.3 U1.5 U1.15 U1.35 U1.43 U2.1 U2.1.4 U2.2.4 U3.2 USB1.0 USB1.5 | length 25389
  Top Layer w10: USB1.0@1177.69,2402.5 1153,2402.5 1153,2375.24 1145.76,2368 1145.76,2326.26 1145.76,2261.64 1145.12,2261 1145.12,2197.18 1145.12,2117.5 1177.69,2117.5 1202,2117.5 1333.5,1986 1486,1986 1540,2040 1540,2065 RV2.1 ; USB1.0@1283.99,2164.3 1283.99,2209.23 USB1.5 ; USB1.0@1283.99,2354.9 1283.99,2560 1295,2571.01 C11.1 1383.6,2777.6 1464.9,2858.9 1700,2858.9 ; RV3.1 1742.18,2381.18 1779,2381.18 ; R14.1 1595,4681 ; P2.5 1670,1625 R8.1 1620,1625.1 1593.9,1599 C8.1 1593.9,1370 1706.1,1257.8 C16.2 1706.1,1105.9 1892,920 1976,920 2369.13,1313.13 Q1.2 2332,1454.45 2332,1770.5 ; C24.1 1779,2381.18 ; R15.2 1975,4460 1988,4473 2058.9,4473 2058.9,4304 2044,4289.1 2044,4071 1957,3984 1789,3984 1765,3960 1765,3805 1807,3763 1968,3763 ; U1.5 2200,2316.5 2257.01,2259.49 U1.15 2257.01,1999 2158.5,1900.49 C17.1 2158.5,1812 2200,1770.5 2332,1770.5 ; C7.1 C7.1@2276,3877.64 ; C23.1 2380,2838.86 2429.17,2838.86 2430.83,2837.2 C14.1 ; C19.1 C19.1@2408.5,1842 ; U2.2.4 2640,3925 2589,3976 2589,4207 2784,4402 2784,4437.72 R22.1 ; C13.1 2804,3338.54 2804,3152 2884,3072 2884,2821.64 C20.1 ; U2.1 3606,2219 3606,2772.64 ; SW1.A SW1.C SW1.B 3936.74,2772.64 3606,2772.64 ; R9.1 4058.39,3362.61 4080,3341 4184,3341 4379,3536 4379,3902 4365,3916 4365,4022.8 4380,4037.8 C5.1 4395,4060 ; C4.1 4141.1,4362 4120.79,4382.31 C3.1 ; K1.2 4120.79,5062.2 4120.79,4839.23 ; C6.1 4419.06,4084.06 4395,4060 ; 1595,4681 1595,4936 1750,5091 1750,5180 1773,5203 2049.76,5203 P1.3 2115.2,5099 2148.72,5099 R22.1 ; 1595,4681 1591,4685 1520,4685 1509,4674 1509,4365 1546.46,4327.54 C12.1 1440,4187.56 1440,3805 U2.1.4 1735,3805 1820,3720 1925,3720 1968,3763 ; 1700,2858.9 C10.2 ; 1700,2858.9 1685,2843.9 1685,2740 1738,2687 1738,2422.18 1779,2381.18 ; C10.2 1715,3120 1665,3170 1617.6,3170 1607.6,3180 T3.2 1607.6,3296 1645,3333.4 T4.3 2019.2,3410.8 2073.82,3356.18 C15.1 2232.18,3356.18 2276,3400 C7.1@2276,3877.64 ; C10.2 1861,2858.9 1873.28,2871.18 C22.2 2020,2843 2005.74,2828.74 1951.53,2828.74 1951.53,2712.16 2081.86,2712.16 2194.02,2600 U1.43 2194.02,2470 2204.02,2460 2435.98,2460 2445.98,2470 U1.35 2445.98,2554.11 2590,2698.13 C14.1 ; 1968,3763 2065,3860 ; 1968,3763 1995,3763 2065,3833 2065,3860 ; 2065,3860 C9.1 2165,3921.1 2208.46,3877.64 C7.1@2276,3877.64 ; 2332,1770.5 2332,1800 2374,1842 C19.1@2408.5,1842 ; 2332,1770.5 2363.95,1770.5 2408.5,1815.06 C19.1@2408.5,1842 ; C14.1 2637.77,2837.2 2677.73,2877.17 2720,2877.17 2797.93,2799.24 2797.93,2772.64 C20.1 ; R22.1 2864.28,4492 2974.56,4492 3049,4417.56 U3.2 3144,4417.56 3149,4422.56 C21.1 3292,4422.56 3348.18,4478.74 C18.1 3738,4478.74 3756.74,4460 C3.1 ; C20.1 3606,2772.64 ; C3.1 4120.79,4839.23 ; 4120.79,4839.23 4228.23,4946.67 4288.33,4946.67 4395,4840 4395,4060
  Bottom Layer w10: USB1.0@1177.69,2117.5 1237.19,2117.5 ; USB1.0@1177.69,2402.5 1236.39,2402.5 USB1.0@1283.99,2354.9 ; USB1.0@1283.99,2164.3 1237.19,2117.5 ; P2.5 1352.5,2117.5 1237.19,2117.5 ; SW1.B 4171.65,2755.59 SW1.MT2
NetC1_1: C1.1 R1.1 SW1.2 U1.27 | length 2423.8
  Top Layer w10: U1.27 2632.5,2253.5 v1(2728,2349) ; C1.1 3728,2652.09 v1@3730.91,2655 ; v1(3717,2655) v1@3730.91,2655 ; v1(3867,2655) R1.1 v1@3730.91,2655
  Bottom Layer w10: v1(2728,2349) 3411,2349 v1(3717,2655) ; v1(3867,2655) 4389.96,2655 SW1.2
NetC2_1: C2.1 R5.1 SW1.MT1 U1.29 | length 2882.1
  Top Layer w10: U1.29 2596,2316.5 2763.5,2484 v1(2919,2484) ; C2.1 3722,3246.46 3727.98,3240.47 R5.1 4056,3240.47 4092.06,3204.41 SW1.MT1
  Bottom Layer w10: v1(2919,2484) 3639.41,3204.41 SW1.MT1
NetC8_2: C8.2 C11.2 D3.1 F1.1 F1.2 R3.1 R8.2 RV3.2 U1.7 USB1.1 USB1.2 | length 4039.2
  Top Layer w10: C11.2 1255.4,2852.4 ; C8.2 1556.1,1610 1560.95,1614.84 R8.2 1560.95,1715 ; F1.1 F1.2 1502,2380 RV3.2 1490,2342.32 1500.32,2332 R3.1 1412,2295 1403,2286 USB1.2 USB1.1 1260,2311.59 1243,2328.59 1243,2840 1255.4,2852.4 ; U1.7 2052.5,2253.5 1690,1891 1583,1880 1583,1737.05 1560.95,1715 ; 1255.4,2852.4 1122,2852.4 1106,2836.4 1106,2010 1228.6,1887.4 D3.1 1560,1887.4 1571,1876.4 1571,1746.05 1560.95,1736 1560.95,1715
NetC12_2: C12.2 R12.1 U2.1.3 | length 695.9
  Top Layer w10: R12.1 1603.54,4405.51 C12.2 1603.54,4111.54 1520,4028 1520,3895 1560,3855 U2.1.3
NetC13_2: C13.2 R13.1 U1.36 | length 1592.4
  Top Layer w10: U1.36 2414.49,2550.9 2443,2579.41 2443,2760 2402.75,2800.25 2364.75,2800.25 2350,2815 2350,3083.85 2568.57,3302.43 ; v1(2533,3312) 2559,3312 2568.57,3302.43 ; R13.1 2590.4,3324.25 2568.57,3302.43 ; C13.2 2840,3281 v1(2952,3281)
  Bottom Layer w10: v1(2533,3312) 2921,3312 v1(2952,3281)
NetC15_2: C15.2 R21.1 U1.37 | length 1095.2
  Top Layer w10: U1.37 2382.99,2556.41 2362.88,2576.53 2362.88,2689.76 2294.58,2758.05 2294.58,2797.42 2280,2812 2233,2812 2175,2870 C15.2 2299.18,3260 R21.1
NetC17_2: C17.2 Q1.3 U1.16 | length 1085.1
  Top Layer w10: C17.2 2288.5,1922 ; v1(2288.5,1870) 2288.5,1922 ; U1.16 2288.5,1922 ; Q1.3 2520,1454.45 2570,1504.45 v1(2570,1870)
  Bottom Layer w10: v1(2288.5,1870) v1(2570,1870)
NetC19_2: C19.2 Q1.1 U1.17 | length 651.7
  Top Layer w10: U1.17 2320,1982 2360,1942 2409.5,1942 2471.5,1880 C19.2 2471.5,1810.5 2369.13,1708.13 Q1.1
NetC22_1: C22.1 L1.2 | length 227
  Top Layer w10: C22.1 2130,2768.82 2134.92,2773.74 L1.2
NetC23_2: C23.2 U1.42 | length 1196.9
  Top Layer w10: v1(2076,2957) 2076,2840 2042,2806 1971.53,2806 1971.53,2732.16 2194.35,2732.16 2225.51,2701 U1.42 ; C23.2 2400,2873.9 v1(2400,2957)
  Bottom Layer w10: v1(2076,2957) v1(2400,2957)
NetC24_2: C24.2 U1.6 | length 165.1
  Top Layer w10: C24.2 2013,2278.82 2019.18,2285 U1.6
NetD1_1: D1.1 P2.6 R16.2 U1.13 | length 1128.8
  Top Layer w10: R16.2 2056.04,1189.06 2017,1228.1 D1.1 1945,1228.1 P2.6 2075,1755 2075,1860.98 2194.02,1980 U1.13
NetD2_A: D2.A K1.1 | length 502.9
  Top Layer w10: K1.1 3993.39,4997 4012.39,4978 D2.A
NetP1_1: P1.1 R18.2 U3.4 | length 1907.1
  Top Layer w10: v1(2907,4452) 2909.96,4454.96 U3.4
  Bottom Layer w10: P1.1 1814.81,4837.56 R18.2 2830,4529 v1(2907,4452)
NetP1_2: P1.2 R11.1 R12.2 R14.2 | length 1234.5
  Top Layer w10: R14.2 1541.85,4600 ; R12.2 1545,4535 1541.85,4538.15 1541.85,4600 ; P1.2 1968.5,4984.06 R11.1 1909.94,4579 1562.85,4579 1541.85,4600
NetP2_2: P2.2 U1.11 U2.6 | length 3132.5
  Top Layer w10: P2.2 1899,1779 1899,1700 1920,1679 1970,1679 2017,1726 2017,2080 2064.52,2127.52 U1.11
  Bottom Layer w10: P2.2 3930,1825 U2.6
NetP2_3: P2.3 U1.10 U2.4 | length 2792.5
  Top Layer w10: U1.10 2130,2159.02 2146,2143.02 2146,2114 2139,2107 v1(2139,1996)
  Bottom Layer w10: P2.3 1895,1775 1895,1931 1960,1996 1989.79,1996 ; v1(2139,1996) 1989.79,1996 ; U2.4 3930.79,2025.79 1989.79,2025.79 1989.79,1996
NetP2_4: P2.4 U1.9 U2.3 | length 3521.7
  Top Layer w10: P2.4 1991,1771 1991,2141.51 2040,2190.51 U1.9
  Bottom Layer w10: P2.4 4025,1725 4260,1960 4260,2135 4240,2155 3960,2155 U2.3
NetQ1_4: Q1.4 U1.23 | length 656.8
  Top Layer w10: Q1.4 2480,1545 2528,1593 2528,2127.52 U1.23
NetR3_2: R3.2 U1.3 | length 658.4
  Top Layer w10: v1(1539.69,2248.69) R3.2 ; v1(2010.49,2379.49) U1.3
  Bottom Layer w10: v1(1539.69,2248.69) 1879.69,2248.69 v1(2010.49,2379.49)
NetR6_1: R6.1 RV2.2 USB1.3 | length 563.8
  Top Layer w10: USB1.3 1263.41,2260.41 1243,2240 1243,2120 1298,2065 RV2.2 1489.27,2065 1489.27,2105.95 1500,2116.68 R6.1
NetR6_2: R6.2 U1.4 | length 638.1
  Top Layer w10: R6.2 1716.37,2332 2050,2332 2065.99,2347.99 U1.4
NetR7_1: R7.1 R9.2 U1.38 | length 2658.1
  Top Layer w10: v1(2322,2637) 2341.99,2637 2342.88,2545.04 U1.38 ; v1(4124,3388) 4124,3544.82 R9.2 R7.1
  Bottom Layer w10: v1(2322,2637) 3024,2637 3763,3376 4112,3376 v1(4124,3388)
NetR10_1: R10.1 R13.2 U2.1.1 | length 1841.2
  Top Layer w10: U2.1.1 1660,3955 ; v1(1695,3845) 1695,3920 1660,3955 ; R10.1 1803.72,4004 1735,4004 1686,3955 1660,3955 ; v1(2594,3269) 2633.86,3308.86 2633.86,3341.14 2619.25,3355.75 R13.2
  Bottom Layer w10: v1(1695,3845) 2271,3269 v1(2594,3269)
NetR10_2: R10.2 R15.1 U2.1.2 | length 1063.9
  Top Layer w10: U2.1.2 1566,3905 1551,3920 1551,3964 1987,4400 2020.12,4400 R15.1 2030.12,4327.8 2017.72,4315.4 R10.2
NetR17_1: R17.1 T3.3 | length 291.4
  Top Layer w10: R17.1 1409.67,3120.8 T3.3
NetR18_1: R18.1 T1.3 U3.3 | length 879.8
  Top Layer w10: U3.3 3074.06,4681.62 R18.1 3115,4952.56 T1.3
NetR19_1: R19.1 U1.31 | length 1686.7
  Top Layer w10: R19.1 1979,3340 1999,3320 v1(1999,3004) ; U1.31 2583.49,2379.49 2701,2497 v1(2701,2837)
  Bottom Layer w10: v1(1999,3004) 2534,3004 v1(2701,2837)
NetR19_2: R19.2 T3.1 | length 322.1
  Top Layer w10: T3.1 1682.4,3260 1703.34,3280.94 R19.2
NetR20_1: R20.1 T2.1 T2.2 T4.1 T4.2 | length 909.8
  Top Layer w10: T2.2 T2.1 1405,3509.2 T4.2 T4.1 1682.4,3519 2101.44,3519 2142.44,3560 R20.1
NetR20_2: R20.2 T1.1 | length 1998.8
  Top Layer w10: R20.2 v1(2197.56,3783)
  Bottom Layer w10: v1(2197.56,3783) 2790.56,4376 2923,4376 2947,4400 2947,4850 2915,4882 T1.1
NetR21_2: R21.2 U2.2.6 U2.2.7 | length 995.8
  Top Layer w10: R21.2 2439,3340 2998,3899 2998,3960 2983,3975 U2.2.6 U2.2.7
NetR22_2: R22.2 U2.2.5 U3.1 | length 846.5
  Top Layer w10: U2.2.5 2880,3925 2820,3985 2820,4392.28 R22.2 2878,4402.28 2887.72,4412 2999,4412 3030.84,4380.16 U3.1
NetSW1_1: SW1.1 U1.28 | length 2461.2
  Top Layer w10: U1.28 2596,2285 2700,2389 v1(2898,2389)
  Bottom Layer w10: v1(2898,2389) 3658,3149 4176,3149 4246.58,3078.42 SW1.1
NetU1_18: U1.18 U2.5 | length 2032.6
  Top Layer w10: U1.18 2351.5,2100 2361.5,2110 2491,2110 2501,2100 2501,1995 v1(2476,1970)
  Bottom Layer w10: v1(2476,1970) 3975,1970 U2.5
Vin: C3.2 C4.2 D2.C D4.2 R7.2 R17.2 T1.2 T2.3 U4.4 | length 7145
  Top Layer w10: T2.3 T2.3@1367.6,3416 ; R17.2 1367.6,3318.4 T2.3@1367.6,3416 ; T1.2 3015,5280 2961,5334 1760,5334 1712,5286 1712,5120 1301,4709 1301,3440 1325,3416 T2.3@1367.6,3416 ; D4.2 3910,4160 3955,4205 4113.9,4205 4178.9,4270 ; v1(4242,4894.39) 4304.39,4832 D2.C 4304.39,4642.17 4219.21,4557 C3.2 4219.21,4408.31 4178.9,4368 C4.2 4178.9,4270 ; R7.2 4347.91,3840 4292.91,3895 U4.4 4175,3998 4218,4041 4218,4194.9 4178.9,4234 4178.9,4270
  Bottom Layer w10: T1.2 3015,4959.39 3080,4894.39 v1(4242,4894.39)
pads on no net: D3.2 U1.1 U1.8 U1.12 U1.19 U1.20 U1.21 U1.22 U1.25 U1.26 U1.30 U1.32 U1.33 U1.39 U1.40 U1.41 U2. U2.1.5 U2.1.6 U2.1.7 U2.2.1 U2.2.2 U2.2.3 U4.1 U4.2 U4.3 USB1.4